# EAGLE board BasicSensor-v1.0 (EAGLE 7.0.0)
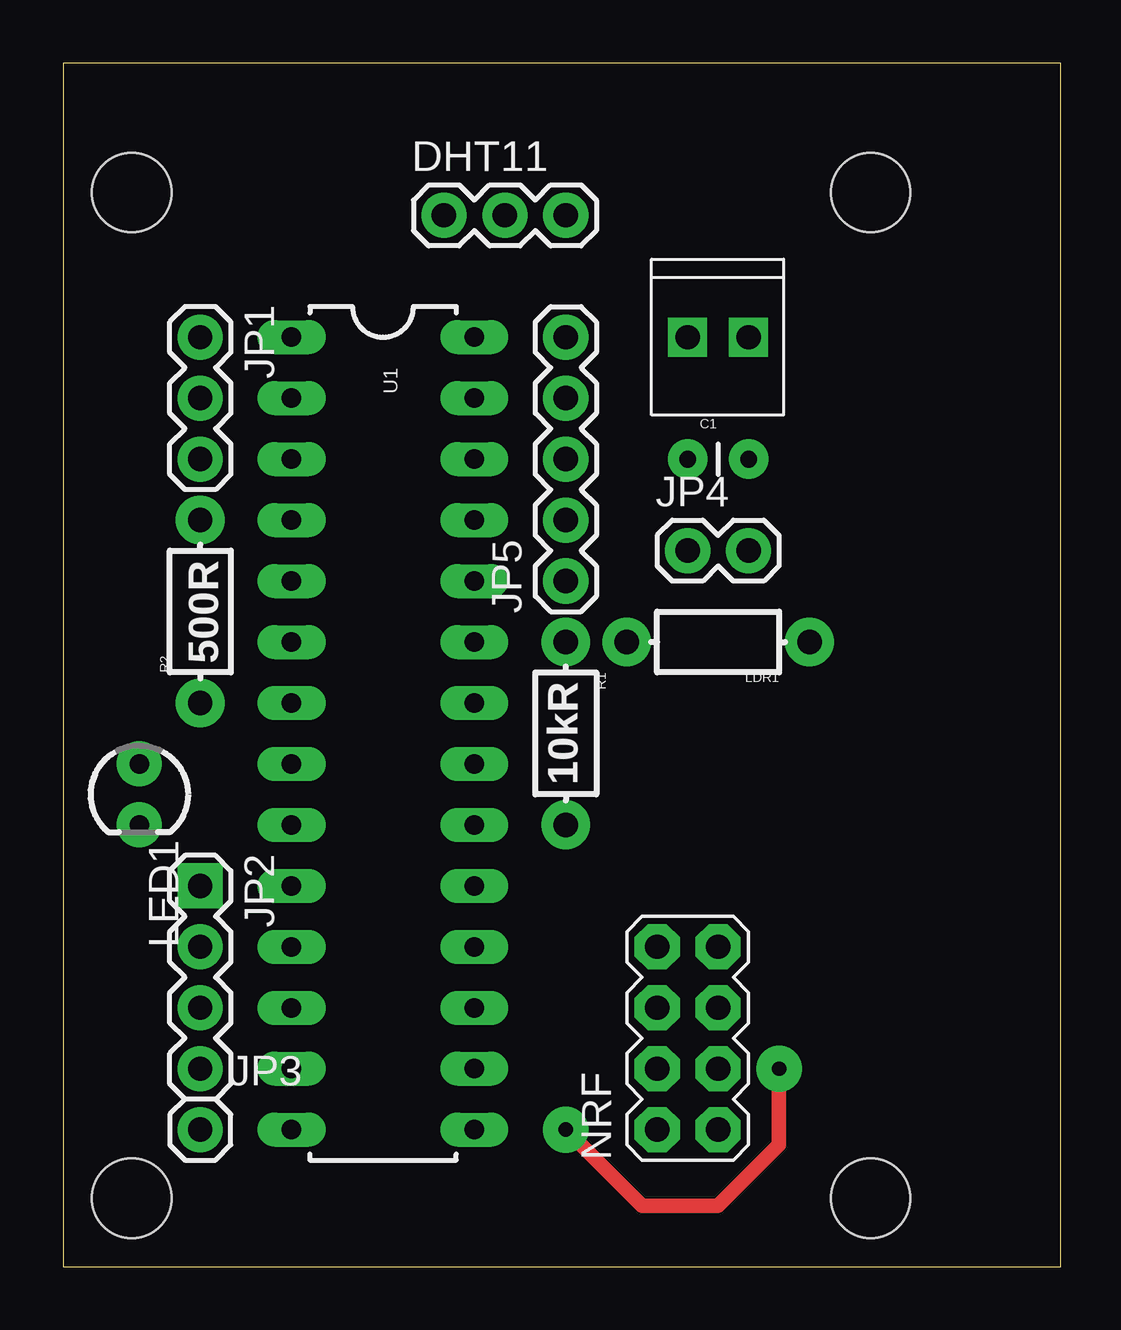
[diagram p0: board, top side]
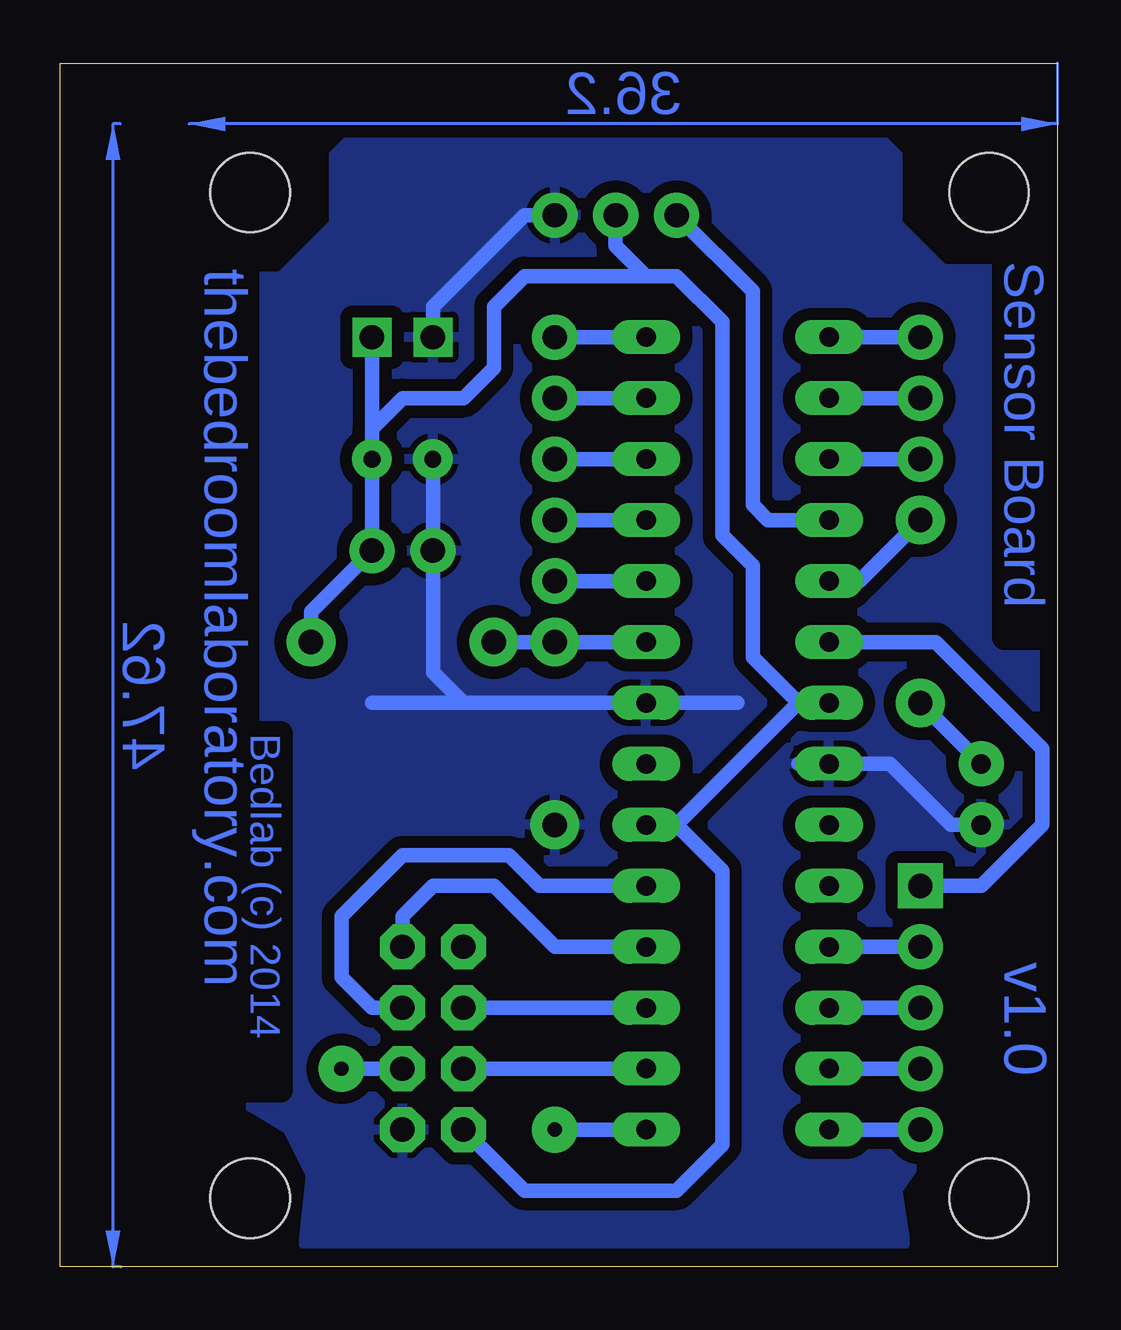
[diagram p1: board, bottom side, seen from below]

Size 41.58 x 50.16 mm. Coordinates in mm from the lower left corner, seen from the top.
Outline: 0,0 41.58,0 41.58,50.16 0,50.16 0,0
Copper layers (1*16): Top 0.035mm / dielectric 1.5mm / Bottom 0.035mm
Design rules "SparkFun-Home": minimum track width 24mil, minimum drill 20mil, track to track 20mil, track to pad 20mil, pad to pad 20mil, via to via 20mil, smd to smd 8mil, copper to edge 10mil, drill to drill 8mil, minimum pad ring 12mil, minimum via ring 10mil, stop-mask expansion 4mil, vias tented up to drill 25mil, thermal gap 10mil

## Footprints (pad centres in the part's own frame; a part is rotated, then mirrored left to right if it is on the bottom)
CAP-PTH-SMALL = drill 0.7 pad 1.651: 1 0,0; 2 2.54,0
1X03 = drill 1.016 pad 1.88: 1 0,0; 2 2.54,0; 3 5.08,0
1X04 = drill 1.016 pad 1.88 square: 1 0,0 | drill 1.016 pad 1.88: 2 2.54,0; 3 5.08,0; 4 7.62,0
1X01 = drill 1.016 pad 1.88: 1 0,0
1X02 = drill 1.016 pad 1.88: 1 0,0; 2 2.54,0
1X05 = drill 1.016 pad 1.88: 1 0,0; 2 2.54,0; 3 5.08,0; 4 7.62,0; 5 10.16,0
AXIAL-0.3-KIT = drill 1.016 pad 2.032: P$1 -3.81,0; P$2 3.81,0
LED3MM = drill 0.813 pad 1.88: A -1.27,0; K 1.27,0
2X4 = drill 1.016 pad 1.88 octagon: 1 -3.81,-1.27; 2 -3.81,1.27; 3 -1.27,-1.27; 4 -1.27,1.27; 5 1.27,-1.27; 6 1.27,1.27; 7 3.81,-1.27; 8 3.81,1.27
1X02_2.54_SCREWTERM = drill 1.016 square: P1 2.54,0; P2 0,0
DIL28-3 = drill 0.813 long: 1 -16.51,-3.81; 2 -13.97,-3.81; 3 -11.43,-3.81; 4 -8.89,-3.81; 5 -6.35,-3.81; 6 -3.81,-3.81; 7 -1.27,-3.81; 8 1.27,-3.81; 9 3.81,-3.81; 10 6.35,-3.81; 11 8.89,-3.81; 12 11.43,-3.81; 13 13.97,-3.81; 14 16.51,-3.81; 15 16.51,3.81; 16 13.97,3.81; 17 11.43,3.81; 18 8.89,3.81; 19 6.35,3.81; 20 3.81,3.81; 21 1.27,3.81; 22 -1.27,3.81; 23 -3.81,3.81; 24 -6.35,3.81; 25 -8.89,3.81; 26 -11.43,3.81; 27 -13.97,3.81; 28 -16.51,3.81
STAND-OFF = hole 3.302: 0,0

## Placement (x,y rotation side)
C1  1uF  [CAP-PTH-SMALL]  26.04,33.66 0 top
DHT11  [1X03]  15.88,43.81 0 top
JP1  [1X03]  5.71,38.73 270 top
JP2  [1X04]  5.71,15.88 270 top
JP3  M01PTH  [1X01]  5.71,5.71 0 top
JP4  M02PTH  [1X02]  26.04,29.84 0 top
JP5  [1X05]  20.95,28.57 90 top
LDR1  [AXIAL-0.3-KIT]  27.3,26.04 180 top
LED1  [LED3MM]  3.17,19.68 270 top
NRF  M04X2  [2X4]  26.04,9.53 90 top
POWER  M022.54MM_SCREWTERM  [1X02_2.54_SCREWTERM]  26.04,38.73 0 top
R1  10kR  [AXIAL-0.3-KIT]  20.95,22.23 270 top
R2  500R  [AXIAL-0.3-KIT]  5.71,27.3 90 top
U1  ATMEGA328P_PDIP  [DIL28-3]  13.34,22.23 270 top
U$1  [STAND-OFF]  33.66,44.77 0 top
U$2  [STAND-OFF]  2.86,44.77 0 top
U$3  [STAND-OFF]  2.86,2.86 0 top
U$4  [STAND-OFF]  33.66,2.86 0 top

## Library data of the parts
C1 LDR1 R1 R2 = SparkFun-Passives
DHT11 JP1-JP5 NRF POWER = SparkFun-Connectors
LED1 = SparkFun-LED
U1 = SparkFun-DigitalIC
U$1-U$4 = SparkFun-Electromechanical

## Nets
A1: JP5.1 U1.24
A2: JP5.2 U1.25
A3: JP5.3 U1.26
A4: JP5.4 U1.27
A5: JP5.5 U1.28
D4: JP2.1 U1.6
D5: JP2.2 U1.11
D6: JP2.3 U1.12
D7: JP2.4 U1.13
D8: JP3.1 U1.14
GND: C1.1 DHT11.3 JP4.1 LED1.K NRF.1 POWER.P2 R1.P$2 U1.8 U1.22
N$1: LDR1.P$2 R1.P$1 U1.23
N$2: LED1.A R2.P$1
N$3: DHT11.1 U1.4
N$4: R2.P$2 U1.5
N$5: NRF.3 U1.15
N$6: NRF.4 U1.16
N$7: NRF.5 U1.19
N$9: NRF.7 U1.18
N$10: NRF.6 U1.17
RESET: JP1.1 U1.1
RX: JP1.2 U1.2
TX: JP1.3 U1.3
VCC: C1.2 DHT11.2 JP4.2 LDR1.P$1 NRF.2 POWER.P1 U1.7 U1.20

## Tracks (layer width: path | path; a pad name or v marks a point on that pad's centre or on a via)
A1
  Bottom 0.61: U1.24 JP5.1
A2
  Bottom 0.61: U1.25 JP5.2
A3
  Bottom 0.61: U1.26 JP5.3
A4
  Bottom 0.61: U1.27 JP5.4
A5
  Bottom 0.61: U1.28 JP5.5
D4
  Bottom 0.61: JP2.1 3.17,15.88 0.64,18.41 0.64,21.59 5.08,26.04 U1.6
D5
  Bottom 0.61: JP2.2 U1.11
D6
  Bottom 0.61: JP2.3 U1.12
D7
  Bottom 0.61: JP2.4 U1.13
D8
  Bottom 0.61: JP3.1 U1.14
GND
  Bottom 0.61: LED1.K 4.45,18.41 6.99,20.95 U1.8 10.79,20.95 | C1.1 JP4.1 26.04,24.77 24.77,23.5 | 24.77,23.5 U1.22 13.34,23.5 | 28.57,23.5 24.77,23.5 | POWER.P2 26.04,40.01 22.23,43.81 DHT11.3
  pour Bottom: 6.67,46.35 6.67,43.5 4.76,41.59 0.95,41.59 0.95,6.03 4.45,6.35 6.67,3.17 6.35,0.95 31.43,0.95 31.11,3.81 32.07,5.71 33.66,6.67 33.66,41.27 32.38,41.27 30.16,43.5 30.16,46.35 29.53,46.99 7.3,46.99
N$1
  Bottom 0.61: U1.23 R1.P$1 LDR1.P$2
N$2
  Bottom 0.61: LED1.A R2.P$1
N$3
  Bottom 0.61: U1.4 12.06,31.11 12.7,31.75 12.7,40.64 DHT11.1
N$4
  Bottom 0.61: R2.P$2 8.26,28.57 U1.5
N$5  (via drill 0.6 pad 1.91)
  Top 0.61: v20.95,5.71 24.13,2.54 27.3,2.54 29.84,5.08 v29.84,8.26
  Bottom 0.61: U1.15 v20.95,5.71 | NRF.3 v29.84,8.26
N$6
  Bottom 0.61: U1.16 NRF.4
N$7
  Bottom 0.61: NRF.5 28.57,10.79 29.84,12.06 29.84,14.61 27.3,17.14 22.86,17.14 21.59,15.88 U1.19
N$9
  Bottom 0.61: U1.18 20.95,13.34 23.5,15.88 26.04,15.88 27.3,14.61 NRF.7
N$10
  Bottom 0.61: U1.17 NRF.6
RESET
  Bottom 0.61: JP1.1 U1.1
RX
  Bottom 0.61: JP1.2 U1.2
TX
  Bottom 0.61: JP1.3 U1.3
VCC
  Bottom 0.61: DHT11.2 18.41,42.55 17.14,41.27 | U1.7 10.79,23.5 | 17.14,41.27 15.88,41.27 13.97,39.37 13.97,30.48 12.7,29.21 12.7,25.4 10.79,23.5 | NRF.2 22.23,3.17 15.88,3.17 13.97,5.08 13.97,16.51 15.88,18.41 | 28.57,34.92 C1.2 JP4.2 31.11,27.3 LDR1.P$1 | POWER.P1 28.57,34.92 | 28.57,34.92 27.3,36.2 24.77,36.2 23.5,37.47 23.5,40.01 22.23,41.27 17.14,41.27 | 10.79,23.5 15.88,18.41 | 15.88,18.41 U1.20
(copper drawn outside any net)
  shapes: Bottom area x2

## Text on the board
Bottom: Sensor Board | thebedroomlaboratory.com | Bedlab (c) 2014 | v1.0